# Altium PCB Wuerfel.PcbDoc
Units mil, origin at the board's own origin, x right, y up, seen from the top; angles counter-clockwise.
Board outline 4625.98 x 2755.91 mil, 2 copper layers (Top Layer, Bottom Layer); 32 components, 40 nets, 143 pads, 0 vias.
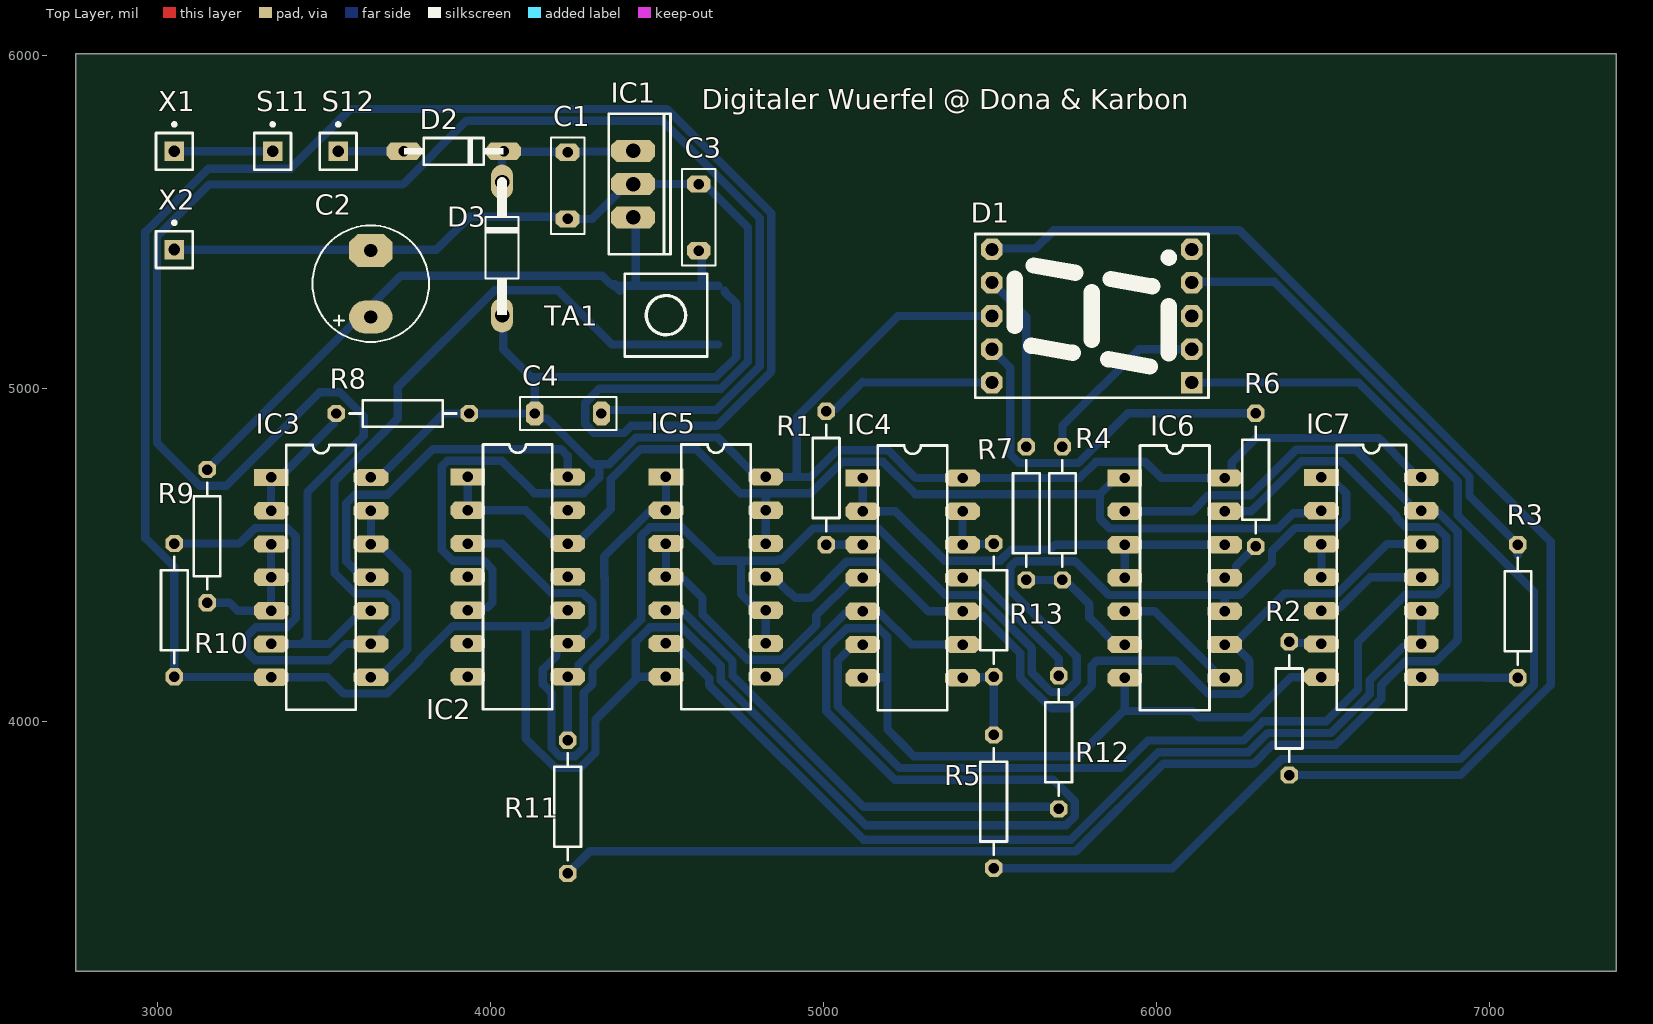
[diagram p0: Top Layer view]
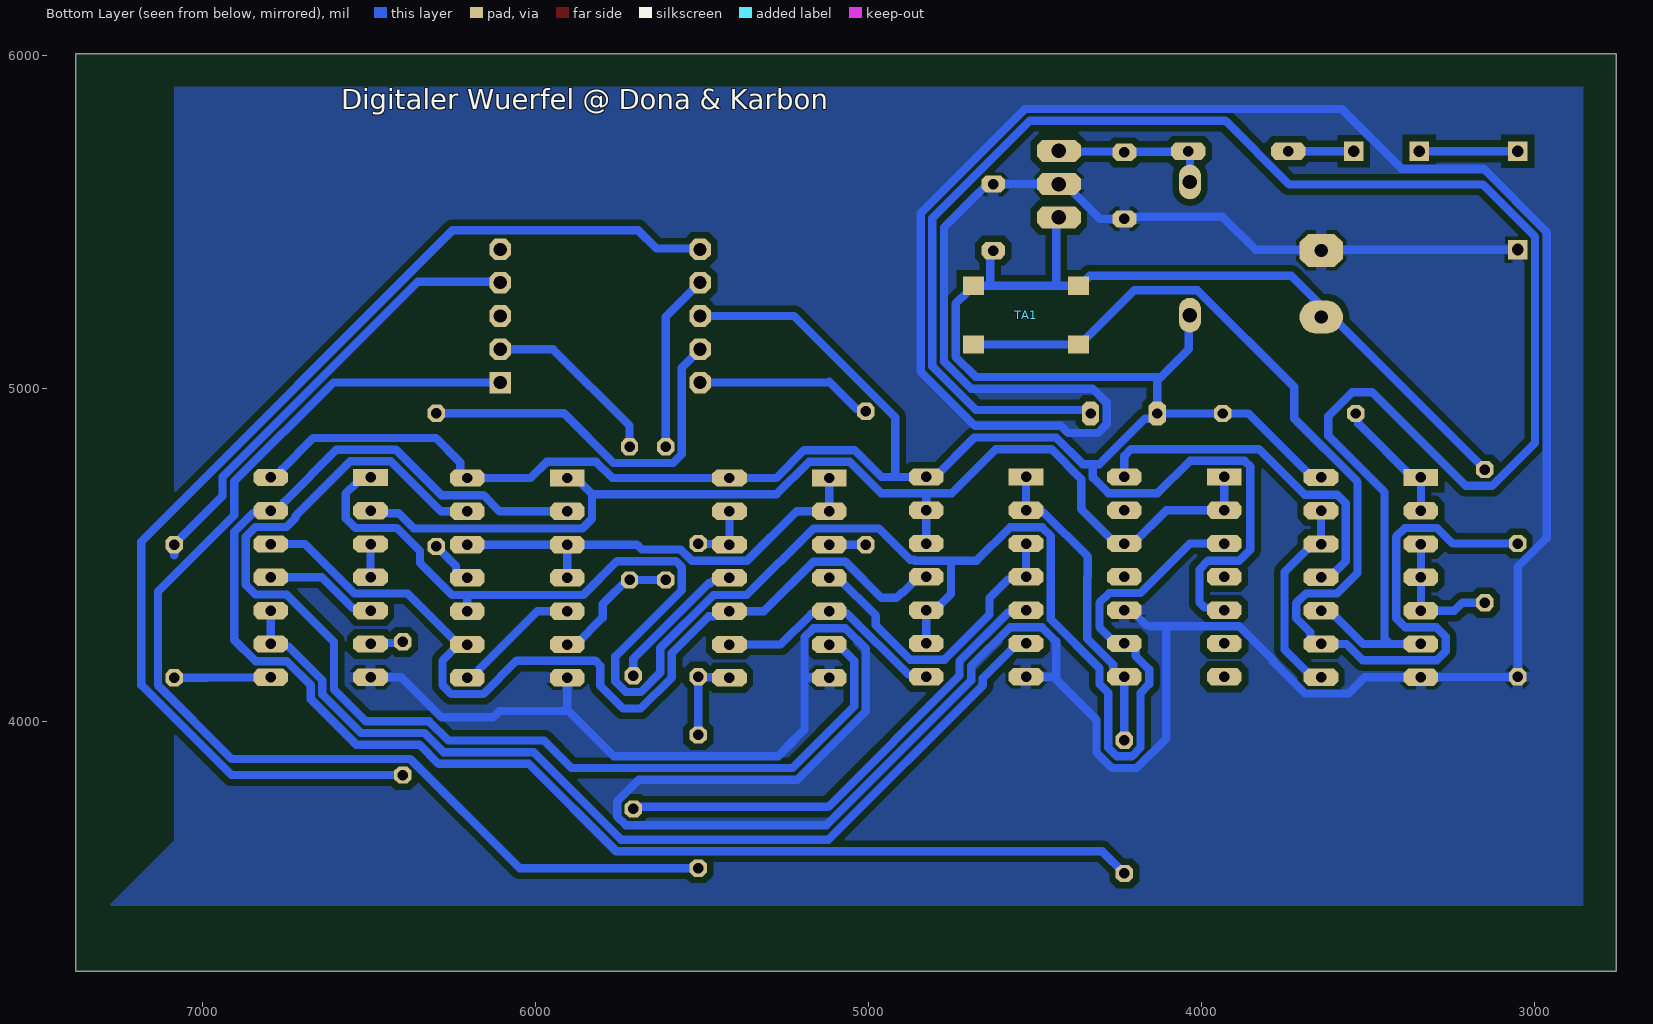
[diagram p1: Bottom Layer view, seen from below]
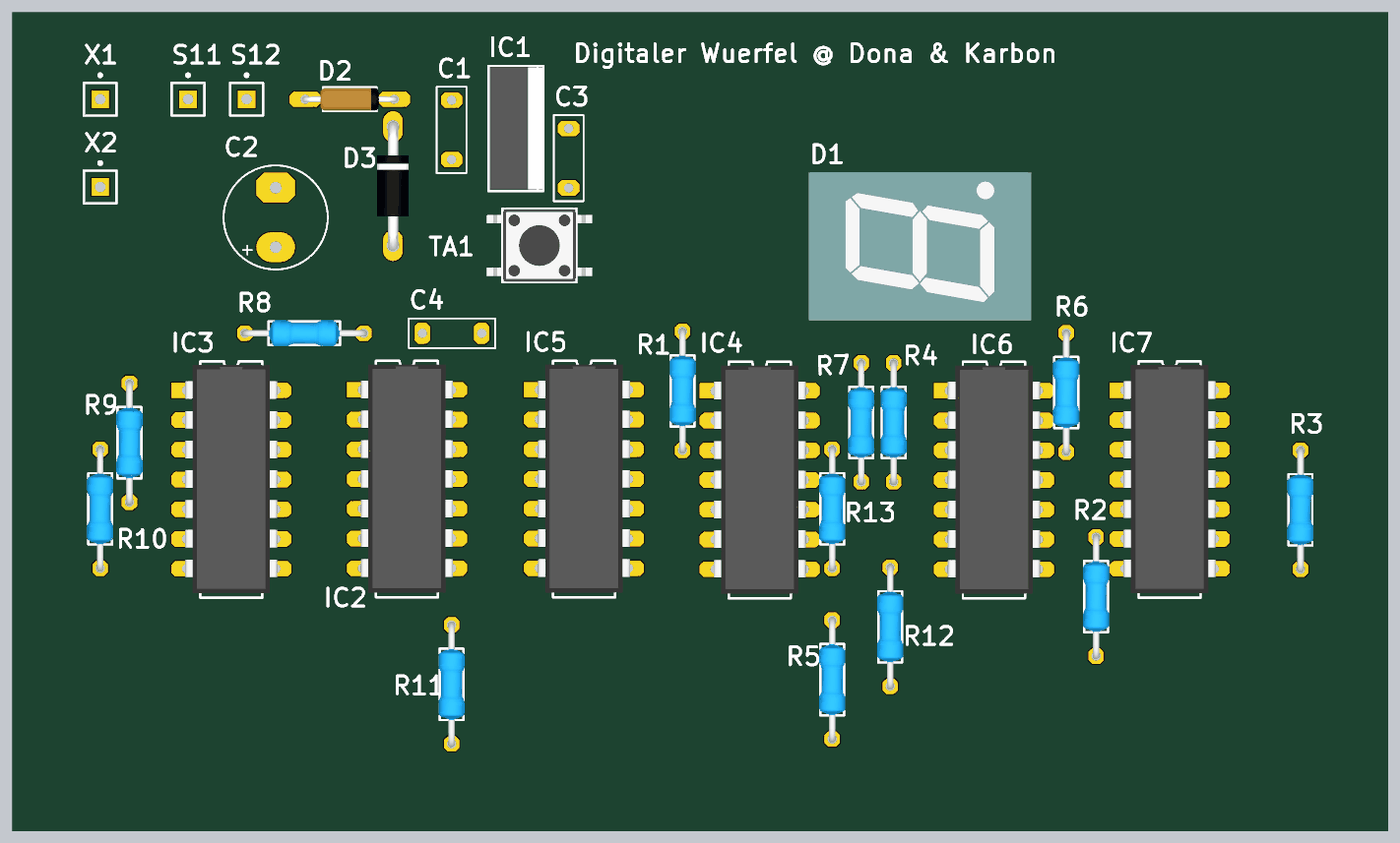
[diagram p2: 3D render of the assembled board from above, using the file's embedded part models]

## Layer stack, top to bottom
Top Solder: solder mask 0.4, Solder Resist, Dk 3.5
Top Layer: signal copper 1.4
Dielectric1: dielectric 12.6, FR-4, Dk 4.8
Bottom Layer: signal copper 1.4
Bottom Solder: solder mask 0.4, Solder Resist, Dk 3.5

## Board outline
2755.91,3248.03 2755.91,6003.94 7381.89,6003.94 7381.89,3248.03

## Design rules (kind name [scope] priority, off if disabled: settings)
Clearance "Text (Polygon)" [inPolygon vs isText] p1: gap=0 ignorepadtopadclearanceinfootprint=FALSE
Clearance "Masseflaeche (Polygon)" [All vs inPolygon] p2: gap=20 ignorepadtopadclearanceinfootprint=FALSE except(0: Arc-Hole Track-Hole SMDPad-Hole THPad-Hole Via-Hole Fill-Hole Poly-Hole Region-Hole Text-Hole)
Clearance "Abstand (Clearance)" [All] p3: gap=10 ignorepadtopadclearanceinfootprint=FALSE except(0: Arc-Hole Track-Hole SMDPad-Hole THPad-Hole Via-Hole Fill-Hole Poly-Hole Region-Hole Text-Hole)
DiffPairsRouting [All] p1: maxlimit=15 minlimit=12 mostfreqgap=12 toplayer_minwidth=15 toplayer_maxwidth=15 toplayer_prefwidth=15 bottomlayer_minwidth=15 bottomlayer_maxwidth=15 bottomlayer_prefwidth=15 maxuncoupledlength=500
FabricationTestPointUsage TestPointUsage [All] p1: valid=0 allowmultiple=FALSE
FabricationTestpoint Testpoint [All] p1: side=3 testpointundercomponent=TRUE minsize=40 maxsize=100 preferedsize=60 minholesize=0 maxholesize=40 preferedholesize=32 testpointgrid=1 allowsidetop=TRUE allowsidebottom=TRUE usegrid=TRUE gridtolerance=0.01
HoleSize [All] p1: absolutevalues=TRUE maxlimit=100 minlimit=28 maxpercent=80.000 minpercent=20.000
HoleToHoleClearance [All] p1: gap=10 allowstackedmicrovias=FALSE
PlaneConnect [All] p1: planeconnectstyle=Relief reliefexpansion=20 reliefentries=4 reliefconductorwidth=32 reliefairgap=10
PolygonConnect [All] p1: connectstyle=Relief reliefconductorwidth=32 reliefentries=4 polygonreliefangle="90 Angle" airgapwidth=10
RoomDefinition Wuerfel [InComponentClass('Wuerfel')] p1: confinementstyle=ConfineIn formatcopy=TRUE lockcomponents=FALSE outline 2756.6,3250.43 7382.58,3250.43 7382.58,6006.34 2756.6,6006.34
RoutingVias [All] p1: holewidth=28 width=50 viastyle="Through Hole" minholewidth=28 minwidth=50 maxholewidth=28 maxwidth=50
SMDEntry [All] p1: side=TRUE corner=TRUE anyangle=FALSE
SilkToSilkClearance [All] p1 off: silktosilkclearance=10
SilkToSolderMaskClearance SilkscreenOverComponentPads [IsPad] p1 off: minsilkscreentomaskgap=10 clearancetoexposedcopper=TRUE
SolderMaskExpansion [All] p1: expansion=4 istentingtop=FALSE
UnRoutedNet [All] p1: checkbadconnections=TRUE
Width [All] p1: maxlimit=200 minlimit=11 preferedwidth=25 minimp=50.000000 maximp=50.000000 favimp=50.000000
21 further rules are at their usual default settings.

## Components (designator, comment, footprint, x,y, rotation, side; value= is the part's Value field where it differs from the comment)
C1 "0.33uF" C_RM2-025X075 4232.98,5507.91 r90 top
C2 "1uF" C_POL_RM2-8,5 3641.73,5213.39 r90 top
C3 "0.1uF" C_RM2-025X075 4626.68,5412.64 r90 top
C4 "1nF" C_RM2-025X075 4134.55,4923.66 r0 top
D1 "LED_7Seg_CA" LED_7Seg 5807.09,5216.54 r90 top
D2 "1N4148" D_DO35-RM3 3740.85,5711.06 r0 top
D3 "1N4002" D_DO41-RM4 4036.13,5218.94 r90 top
IC1 "7805" TO-220 4429.83,5712.64 r270 top
IC2 "SN74LS93" DIP14 3932.98,4733.11 r270 top
IC3 "SN74LS00" DIP14 3342.43,4731.53 r270 top
IC4 "SN74LS00" DIP14 5118.8,4729.96 r270 top
IC5 "SN74LS00" DIP14 4528.25,4733.11 r270 top
IC6 "SN74LS00" DIP14 5906.2,4729.96 r270 top
IC7 "SN74LS00" DIP14 6496.76,4731.53 r270 top
R1 "330" R_0207/RM4 5009.3,4729.96 r90 top
R2 "330" R_0207/RM4 6399.72,4037.83 r270 top
R3 "330" R_0207/RM4 7086.61,4329.96 r90 top
R4 "330" R_0207/RM4 5718.8,4623.71 r90 top
R5 "330" R_0207/RM4 5512.5,3758.34 r270 top
R6 "330" R_0207/RM4 6299.21,4724.41 r90 top
R7 "330" R_0207/RM4 5610.24,4623.71 r90 top
R8 "68K" R_0207/RM4 3737.99,4923.66 r180 top value=100K
R9 "33K" R_0207/RM4 3150.3,4555.43 r270 top
R10 "1K" R_0207/RM4 3051.87,4333.11 r90 top
R11 "1" R_0207/RM4 4232.98,3742.56 r90 top
R12 "1" R_0207/RM4 5707.51,3936.02 r90 top
R13 "1" R_0207/RM4 5512.5,4333.08 r270 top
S11 "Plug" PIN1 3347.15,5711.06 r0 top
S12 "Plug" PIN1 3544,5711.06 r0 top
TA1 "Mikrotaster 1x2" "SW_DTSM-61NT/R - 1x2" 4528.25,5218.94 r180 top
X1 "Plug" PIN1 3051.87,5711.06 r0 top
X2 "Plug" PIN1 3051.87,5415.79 r0 top

## Footprints (in the part's own frame and the unit in brackets; to place one, negate y for a bottom-side part, rotate by r counter-clockwise, add the part's x,y. Pads: shape width x height; smd on the part's side, far side on the other; paste and mask are expansions set on the pad)
C_POL_RM2-8,5 [mil] "RM2, diameter 8.5 mm"
  oval 100x130 hole 39.37: 1(0,0)
  oct 100x130 hole 39.37: 2(200,0)
  silkscreen extent -75,-175 275,175
C_RM2-025X075 [mil] "RM2, outline 2.5 x 7.5 mm"
  oct 52x72 hole 31.5: 1(0,0) 2(200,0)
  silkscreen extent -45,-50 245,50
D_DO35-RM3 [mil] "DO35-7, diameter 2 mm, horizontal, grid 7.62 mm"
  oct 104x52 hole 31.5: A(0,0) C(300,0)
  silkscreen extent 0,-40 300,40, body extent -10,-38 310,38, height 77
D_DO41-RM4 [mil] "DO41-10, diameter 2.54 mm, horizontal, grid 10.16 mm"
  oval 104x66 hole 43.31: A(0,0) C(400,0)
  silkscreen extent 0,-50 400,50, body extent -17,-53 417,53, height 132
DIP14 [mil] "DIP; 14 Leads; Row Spacing 7.62 mm; Pitch 2.54 mm"
  rect 52x104 hole 31.5: 1(0,0)
  oct 52x104 hole 31.5: 2(100,0) 3(200,0) 4(300,0) 5(400,0) 6(500,0) 7(600,0) 8(600,300) 9(500,300) 10(400,300) 11(300,300) 12(200,300) 13(100,300) 14(0,300)
  silkscreen extent -98,46 698,254, body extent -85,-5 683,305, height 200
LED_7Seg [mil] "LED, 7-Segment Display, 13 mm"
  rect 65x65 hole 39.37: 1(-200,-300)
  oct 65x65 hole 39.37: 2(-100,-300) 3(0,-300) 4(100,-300) 5(200,-300) 6(200,300) 7(100,300) 8(0,300) 9(-100,300) 10(-200,300)
  silkscreen extent -246,-350 246,350, body extent -250,-374 250,374, height 325
PIN1 [mm] "Connector; Plug"
  rect 1.5x1.5 hole 0.9: 1(0,0)
  silkscreen extent -1.4,-1.4 1.4,2.17
R_0207/RM4 [mil] "type 0207, RM4"
  oct 52x52 hole 31.5: 1(-200,0) 2(200,0)
  silkscreen extent -160,-40 160,40, body extent -211,-44 211,44, height 94
"SW_DTSM-61NT/R - 1x2" [mm] "Switch, Push Button, Thru-Hole; 4 Leads; Body 8.5 x 8.5 mm (LxW typ); Row Spacing 9.0 mm; Pitch 4.5 mm"
  rect 1.6x1.4 smd far side: 1(-4,-2.25) 1(4.01,-2.25) 2(-4,2.24) 2(4.01,2.24)
  silkscreen extent -3.16,-3.16 3.15,3.15, body extent -4.5,-3.1 4.5,3.1, height 4.5
TO-220 [mil] "TO, Thru-Hole, Vertical, Heatsink Mounted; 3 In-Line Leads; Pitch 2.54 mm"
  oct 66x132 hole 43.31: 1(0,0) 2(100,0) 3(200,0)
  silkscreen extent -111,-73 311,112, body extent -105,-69 304,109, height 725

## Part data
C1 C3 C4: library part C, "Capacitor", Rated Voltage=50V, LatestRevisionDate=07-Sep-2019, Published=21-Feb-2011, Usage="only permitted for non-commercial purposes at HTL I Innsbruck"
C2: library part C_POL, "Polarized Capacitor", Rated Voltage=16V, LatestRevisionDate=07-Sep-2019, Published=21-Feb-2011, Usage="only permitted for non-commercial purposes at HTL I Innsbruck"
D1: "Red 7-Segment Display, CA, 13 mm Slim Font", LatestRevisionDate=21-Sep-2017, Published=21-Sep-2017, SimulationModellSource="currently not available", Usage="only permitted for non-commercial purposes at HTL I Innsbruck"
D2: "Si-Diode; 75V, 0.300A, 4.00ns (Diodes Inc.)", LatestRevisionDate=01-Nov-2012, Published=21-Feb-2011, SimulationModellSource="Diodes Incorporated", Usage="only permitted for non-commercial purposes at HTL I Innsbruck"
D3: "Si-Diode; 100V, 1.00A, 3.00us (Diodes, Inc.)", LatestRevisionDate=01-Nov-2012, Published=21-Feb-2011, SimulationModellSource="Diodes Incorporated", Usage="only permitted for non-commercial purposes at HTL I Innsbruck"
IC1: library part 78xx, "Positive-Voltage Regulator", LatestRevisionDate=31-Oct-2012, Published=21-Feb-2011, SimulationModellSource="<no Sim-Modell found so far>", Usage="only permitted for non-commercial purposes at HTL I Innsbruck"
IC2: "4-Bit Binary Counter", LatestRevisionDate=31-Oct-2012, Published=21-Feb-2011, SimulationModellSource="TI Logic Counter", Usage="only permitted for non-commercial purposes at HTL I Innsbruck"
IC3 IC4 IC5 IC6 IC7: "Quad 2-Input Positive-NAND Gate", LatestRevisionDate=31-Oct-2012, Published=21-Feb-2011, Publisher="Michael Kupfner", SimulationModellSource="TI Logic Gate 2", Usage="only permitted for non-commercial purposes at HTL I Innsbruck"
R1 R2 R3 R4 R5 R6 R7 R8 R9 R10 R11 R12 R13: library part R, "Resistor", LatestRevisionDate=07-Sep-2019, Published=21-Feb-2011, Usage="only permitted for non-commercial purposes at HTL I Innsbruck"
TA1: "Mikrotaster 1x2; max DC 50V", LatestRevisionDate=07-Sep-2019, Published=29-Mar-2017, Publisher="Michael Kupfner", SimulationModellSource="<No SimModell found so far>", Usage="only permitted for non-commercial purposes at HTL I Innsbruck"
S11 S12 X1 X2: LatestRevisionDate=17-Jul-2002, LatestRevisionNote="Re-released for DXP Platform.", Publisher="Altium Limited"

## Nets (pads, with @x,y where several pads share a name; then routed paths per layer and width w, separated by ;. In a path a pad name is that pad's centre, name@x,y a point inside that pad or via, vN(x,y) a via of type N, cw(c..) or ccw(c..) an arc to the next point about the centre after c; other vN are vias at no path point)
GND: C1.1 C2.2 C3.2 IC1.2 IC2.10 IC3.7 IC4.7 IC5.7 IC6.7 IC7.7 R10.1 X2.1 | length 14711.5
  Bottom Layer w25: X2.1 3532.93,5415.79 3751.93,5415.79 3839.28,5415.79 3937.7,5514.21 4226.68,5514.21 C1.1 4306.48,5507.91 4385.5,5586.94 4385.5,5592.14 4406,5612.64 IC1.2 C3.2 ; 4158.48,4284.61 4106.98,4284.61 ; 4169.02,4289.47 4206.98,4327.43 IC2.10@4206.98,4333.11 ; 4437.94,4125.48 4437.94,4239.61 4479.93,4281.61 4576.57,4281.61 4692.93,4165.26 4692.93,4122.12 5127.52,3687.52 5729.83,3687.52 5756.01,3713.7 5756.01,3758.34 5690.29,3824.06 5214.84,3824.06 5009.3,4029.6 5009.3,4217.28 5070.48,4278.46 5167.12,4278.46 5193.3,4252.28 5193.3,4131.48 ; IC5.7 4445.57,4133.11 4316.48,4004.02 4316.48,3905.74 4269.79,3859.06 4196.16,3859.06 4106.98,3948.24 4106.98,4284.61 ; C3.2@4635.41,5621.37 4774.73,5482.05 4774.73,5079.37 4693.55,4998.19 4328.26,4998.19 4286.05,4955.98 4286.05,4891.34 4312.23,4865.16 4401.99,4865.16 4423.44,4886.61 4680.96,4886.61 4844.73,5050.38 4844.73,5524.9 4531.49,5838.14 3580.2,5838.14 3401.1,5659.03 3154.75,5659.03 2964.85,5469.13 2964.85,4549.32 3051.87,4462.29 R10.1 3052.66,4132.32 3341.64,4132.32 IC3.7 3512.09,4131.53 3560.59,4083.03 3690.74,4083.03 3787.7,4179.99 3787.7,4184.65 3887.66,4284.61 4106.98,4284.61 ; IC4.7 5120.33,4131.48 5193.3,4131.48 ; 5906.2,4034.44 5765.82,3894.06 5272.98,3894.06 5246.8,3920.24 5246.8,3921.37 5193.3,3974.87 5193.3,4131.48 ; IC6.7 5906.2,4030.3 6110.05,4030.3 6128.89,4011.46 6283.52,4011.46 6403.59,4131.53 IC7.7
INA: IC2.1 IC2.2 IC2.12 IC5.12 IC5.13 IC6.1 IC7.2 | length 3364.4
  Bottom Layer w25: IC2.1 IC2.2 4106.98,4633.11 4206.98,4533.11 IC2.12 4258.98,4533.11 4362.64,4636.77 4362.64,4726.81 4452.43,4816.61 4618.75,4816.61 4750.75,4684.61 4825.1,4684.61 ; IC5.12 IC5.13 4827.75,4633.61 4827.75,4681.96 4825.1,4684.61 ; IC6.1 5880.2,4729.96 5831.7,4681.46 ; IC7.2 6488.93,4623.71 6411.7,4623.71 6366.45,4578.46 5860.88,4578.46 5831.7,4607.64 5831.7,4681.46 ; 4825.1,4684.61 4963.63,4684.61 5057.48,4778.46 5180.12,4778.46 5277.12,4681.46 5831.7,4681.46
INB: IC2.3 IC2.9 IC5.9 IC5.10 IC6.10 IC7.1 | length 5597.1
  Bottom Layer w25: IC2.3 4036.16,4533.11 4184.66,4384.61 4278.3,4384.61 4307.48,4355.43 4307.48,4281.61 4258.98,4233.11 IC2.9 4212.65,4233.11 4199.15,4219.61 4199.15,4196.11 4158.48,4155.43 4158.48,4110.79 4184.66,4084.61 4184.66,4002.51 4184.48,4002.33 4184.48,3920.24 4210.66,3894.06 4255.3,3894.06 4281.48,3920.24 4281.48,4002.33 4281.3,4002.51 4281.3,4084.61 4307.48,4110.79 4307.48,4158.65 4453.75,4304.93 4453.75,4555.43 4479.93,4581.61 4576.57,4581.61 4676.57,4481.61 4753.75,4481.61 ; 4794.43,4481.61 4753.75,4481.61 ; 4796.93,4481.61 4861.95,4481.61 4864.95,4484.61 4876.57,4484.61 4970.42,4578.46 5167.12,4578.46 5367.12,4378.46 5467.12,4378.46 5626.73,4218.85 5626.73,4145.98 5685.19,4087.52 5729.83,4087.52 5761.7,4119.39 5761.7,4194.32 5561.74,4394.29 5561.74,4461.99 5579.78,4480.03 5756.31,4480.03 5857.88,4378.46 6206.2,4378.46 ; IC5.9 IC5.10 4802.25,4333.11 4753.75,4381.61 4753.75,4481.61 ; IC6.10 6206.2,4378.46 ; IC6.10@6226.53,4329.96 IC6.10@6240.03,4343.46 ; IC7.1 6510.26,4718.03 6536.41,4718.03 6571.26,4683.18 6571.26,4609.21 6542.08,4580.03 6417.52,4580.03 6348.41,4510.92 6348.41,4475.34 6251.52,4378.46 6206.2,4378.46
INC: IC2.8 IC5.1 IC5.2 R11.2 | length 952.9
  Bottom Layer w25: R11.2 IC2.8 4253.3,4133.11 4266.8,4146.61 4266.8,4170.11 4344.83,4248.14 4344.83,4431.53 ; 4342.48,4431.53 4342.48,4493.65 4474.11,4625.29 4488.75,4625.29 4496.57,4633.11 IC5.2 IC5.1
NetC1_2: C1.2 D2.C D3.C IC1.1 | length 484.1
  Bottom Layer w25: D3.C 4036.13,5706.34 D2.C ; D2.C@4042.43,5709.49 4231.4,5709.49 C1.2 4235.34,5710.27 4427.46,5710.27 IC1.1
NetC4_2: C4.2 IC3.6 IC3.10 | length 5596.6
  Bottom Layer w25: IC3.6 3435.31,4231.53 ; IC3.10 3616.43,4331.53 3516.43,4231.53 3435.31,4231.53 ; C4.2 4344.83,4933.94 4678.8,4933.94 4809.73,5064.87 4809.73,5510.41 4517,5803.14 3929.74,5803.14 3737.99,5611.39 3156.6,5611.39 2999.85,5454.63 2999.85,4835.06 3127.98,4706.93 3208,4706.93 3488.9,4987.83 3548.35,4987.83 3620.65,4915.52 3620.65,4856.08 3451.93,4687.35 3451.93,4248.14 3435.31,4231.53
NetD1_1: D1.1 R5.2 | length 3482
  Bottom Layer w25: R5.2 6049.4,3558.34 6377.4,3886.33 6913.81,3886.33 7135.11,4107.64 7135.11,4388.99 6906.26,4617.85 6906.26,4718.85 6608.57,5016.54 D1.1 D1.1@6109.49,5018.94
NetD1_2: D1.2 R4.2 | length 546.8
  Bottom Layer w25: R4.2 5718.8,4887.21 5948.13,5116.54 D1.2
NetD1_4: D1.4 R3.2 | length 1372.9
  Bottom Layer w25: D1.4 6109.49,5318.94 6355.67,5318.94 6941.26,4733.35 6941.26,4675.32 R3.2 7086.61,4498.42
NetD1_6: D1.6 R2.2 | length 3417.2
  Bottom Layer w25: D1.6 5509.49,5418.94 5638.23,5418.94 5693.23,5473.94 6250.17,5473.94 7185.04,4539.07 7185.04,4108.07 6914.81,3837.83 R2.2
NetD1_7: D1.7 R7.2 | length 535.5
  Bottom Layer w25: D1.7 5610.24,5213.39 R7.2
NetD1_9: D1.9 R6.2 | length 1148.2
  Bottom Layer w25: D1.9 5562.09,5061.54 5562.09,4931.64 5561.74,4931.29 5561.74,4801.39 5587.92,4775.21 5766.5,4775.21 5915.7,4924.41 R6.2
NetD1_10: D1.10 R1.2 | length 535.6
  Bottom Layer w25: R1.2 5017.13,4937.78 5037.65,4937.78 5118.8,5018.94 5121.2,5016.54 D1.10
NetD2_A: D2.A S12.1 | length 196.9
  Bottom Layer w25: S12.1 D2.A
NetIC2_14: IC2.14 IC3.11 | length 1072.7
  Bottom Layer w25: IC3.11 3616.43,4431.53 3567.93,4480.03 3567.93,4653.85 3594.11,4680.03 3692.27,4680.03 3828.84,4816.61 4212.98,4816.61 4232.98,4796.61 IC2.14
NetIC3_1: IC3.1 IC3.2 R8.2 | length 388.4
  Bottom Layer w25: IC3.2 IC3.1 3368.43,4731.53 3530.17,4893.28 3530.17,4915.84 R8.2
NetIC3_3: IC3.3 IC3.4 IC3.5 R9.2 | length 402
  Bottom Layer w25: R9.2 3217.5,4355.43 3241.4,4331.53 IC3.5 IC3.4 IC3.3
NetIC3_8: IC3.8 IC3.12 IC3.13 | length 621.2
  Bottom Layer w25: IC3.8 3668.43,4131.53 3751.93,4215.03 3751.93,4448.03 3668.43,4531.53 IC3.12 IC3.13
NetIC3_9: IC3.9 R10.2 TA1.2 | length 3435.8
  Bottom Layer w25: R10.2 3247.18,4533.11 3294.11,4580.03 3390.74,4580.03 3416.93,4553.85 3416.93,4309.21 3389.24,4281.53 3295.61,4281.53 3267.93,4253.85 3267.93,4209.21 3294.11,4183.03 3517.42,4183.03 3565.92,4231.53 3661.35,4231.53 3674.85,4245.03 3674.85,4267.14 3716.93,4309.21 3716.93,4353.85 3687.74,4383.03 3594.11,4383.03 3532.93,4444.21 3532.93,4718.85 3722.78,4908.7 3722.78,5003.07 4013.14,5293.44 4203.75,5293.44 4366.44,5130.75 TA1.2@4685.73,5130.75
NetIC4_1: IC4.1 IC4.2 IC6.3 IC6.4 IC6.12 | length 1369
  Bottom Layer w25: IC4.1 IC4.2 5217.23,4629.96 5365.73,4481.46 5531.7,4481.46 5565.28,4515.03 5681.99,4515.03 5696.91,4529.96 IC6.3 ; IC6.4 IC6.3 ; IC6.12 IC6.3
NetIC4_4: IC4.4 IC5.3 IC5.4 | length 941.8
  Bottom Layer w25: IC5.3 IC5.4 4536.07,4425.29 4582.39,4425.29 4637.75,4369.93 4637.75,4319.42 4772.57,4184.61 4876.57,4184.61 4979.36,4287.39 4979.36,4316.51 5092.8,4429.96 IC4.4
NetIC4_5: IC4.5 IC4.9 IC5.8 | length 713.5
  Bottom Layer w25: IC5.8 4836.07,4140.93 4882.39,4140.93 4972.99,4231.53 4974.06,4231.53 5064.66,4322.14 5110.98,4322.14 IC4.5 5126.63,4322.14 5172.94,4322.14 5265.12,4229.96 IC4.9
NetIC4_6: IC4.6 IC6.13 | length 3416.7
  Bottom Layer w25: IC4.6 5092.8,4229.96 5044.3,4181.46 5044.3,4044.09 5229.34,3859.06 5893.52,3859.06 5975.93,3941.46 6263.02,3941.46 6320.61,3999.06 6510.6,3999.06 6606.26,4094.72 6606.26,4237.85 6748.44,4380.03 6842.08,4380.03 6871.26,4409.21 6871.26,4553.85 6842.08,4583.03 6748.44,4583.03 6722.26,4609.21 6722.26,4615.85 6558.08,4780.03 6435.44,4780.03 6285.36,4629.96 IC6.13
NetIC4_10: IC4.10 IC5.11 IC6.9 IC7.12 | length 2753.5
  Bottom Layer w25: IC5.11 4851.77,4433.11 4899.63,4385.25 4902.11,4385.25 4917.43,4369.93 4961.95,4369.93 5070.48,4478.46 5167.12,4478.46 5315.62,4329.96 5450.48,4329.96 5465.94,4314.5 5481.59,4314.5 5591.73,4204.36 5591.73,4131.48 5685.38,4037.83 5737.93,4037.83 5807.09,4106.99 5807.09,4166.81 5821.73,4181.46 6057.88,4181.46 6157.88,4081.46 6254.52,4081.46 6280.7,4107.64 6280.7,4181.46 IC6.9@6232.2,4229.96 ; IC6.9 IC6.9@6232.2,4229.96 ; IC7.12 6693.58,4531.53 6545.08,4383.03 6385.28,4383.03 IC6.9@6232.2,4229.96
NetIC4_11: IC4.11 R12.2 | length 440.7
  Bottom Layer w25: IC4.11 5426.63,4422.14 5467.25,4422.14 5475.93,4413.46 5481.62,4413.46 5707.51,4187.57 R12.2
NetIC4_12: IC4.12 IC4.13 R13.1 | length 195
  Bottom Layer w25: IC4.13 IC4.12 5420.36,4531.52 5510.94,4531.52 R13.1
NetIC5_5: IC5.5 R12.1 | length 1461.1
  Bottom Layer w25: IC5.5 4536.07,4325.29 4582.39,4325.29 4727.93,4179.75 4727.93,4136.62 5121.98,3742.56 5700.97,3742.56 R12.1 ; R12.1@5707.51,3742.56 R12.1@5714.05,3736.02
NetIC5_6: IC5.6 IC7.9 IC7.10 | length 2893.2
  Bottom Layer w25: IC5.6 4554.25,4233.11 4657.93,4129.44 4657.93,4107.62 5121.41,3644.13 5744.35,3644.13 6006.68,3906.46 6277.51,3906.46 6335.11,3964.06 6525.09,3964.06 6641.26,4080.22 6641.26,4122.35 6742.62,4223.71 6788.93,4223.71 IC7.9 IC7.10
NetIC6_2: IC6.2 IC7.13 R11.1 | length 4495.2
  Bottom Layer w25: R11.1 4299.55,3609.13 5758.85,3609.13 6021.18,3871.46 6292.01,3871.46 6349.61,3929.06 6539.59,3929.06 6676.26,4065.72 6676.26,4107.85 6748.44,4180.03 6842.08,4180.03 6906.26,4244.21 6906.26,4568.35 6850.9,4623.71 6804.58,4623.71 IC7.13 6776.43,4631.53 6757.26,4650.71 6757.26,4656.74 6598.97,4815.03 6420.94,4815.03 6284.36,4678.46 6157.88,4678.46 6109.38,4629.96 IC6.2
NetIC6_5: IC6.5 IC6.8 | length 388.6
  Bottom Layer w25: IC6.5 5995.7,4329.96 6172.38,4153.28 6172.38,4143.46 6185.88,4129.96 IC6.8
NetIC7_3: IC7.3 IC7.4 | length 100
  Bottom Layer w25: IC7.4 IC7.3
NetIC7_5: IC7.5 IC7.11 | length 341.4
  Bottom Layer w25: IC7.5 6504.58,4339.36 6550.9,4339.36 6643.07,4431.53 IC7.11
NetS11_1: S11.1 X1.1 | length 295.3
  Bottom Layer w25: X1.1 S11.1
OUT1: IC6.6 R4.1 R7.1 | length 406.2
  Bottom Layer w25: R7.1 5710.98,4423.71 5718.8,4431.53 5799.5,4350.83 5799.5,4310.66 5880.2,4229.96 IC6.6
OUT2: IC6.11 R6.1 | length 144.9
  Bottom Layer w25: IC6.11 6226.53,4429.96 6240.03,4443.46 6240.03,4465.22 R6.1
OUT3: IC7.6 R2.1 | length 99.6
  Bottom Layer w25: R2.1 6402.87,4234.68 6493.61,4234.68 IC7.6
OUT4: IC4.3 R1.1 | length 109.5
  Bottom Layer w25: R1.1 IC4.3
OUT5: IC4.8 R5.1 R13.2 | length 295.7
  Bottom Layer w25: IC4.8@5392.8,4129.96 IC4.8 5420.36,4131.52 5510.94,4131.52 R13.2 R5.1
OUT6: IC7.8 R3.1 | length 290.5
  Bottom Layer w25: IC7.8 6797.17,4131.12 6987.78,4131.12 6988.94,4129.96 R3.1
VCC: C2.1 C3.1 C4.1 D1.8 D3.A IC1.3 IC2.5 IC3.14 IC4.14 IC5.14 IC6.14 IC7.14 R8.1 R9.1 TA1.1 | length 9018.7
  Bottom Layer w25: R9.1 3732.55,5337.68 4336.74,5337.68 4351.38,5323.04 4351.38,5322.58 4361.56,5312.4 4375.26,5312.4 4375.26,5306.57 TA1.1@4389.37,5292.46 ; IC3.14 3668.43,4731.53 3860.55,4923.66 R8.1 C4.1 ; IC2.5 3940.8,4340.93 3992.48,4340.93 4007.48,4355.93 4007.48,4455.43 3981.3,4481.61 3887.66,4481.61 3854.58,4514.69 3854.58,4764.53 3871.66,4781.61 4036.13,4781.61 4133.13,4684.61 4281.3,4684.61 4327.64,4730.95 4327.64,4771.61 ; D3.A@4036.13,5199.94 D3.A ; D3.A@4039.28,5196.79 4039.28,5117.36 4123.45,5033.19 ; TA1.1@4370.38,5307.52 4437.94,5307.52 ; IC1.3 4437.94,5504.53 4437.94,5307.52 ; C3.1 4635.41,5403.9 4635.41,5312.4 4640.3,5307.52 ; TA1.1@4685.73,5307.52 4640.3,5307.52 ; TA1.1@4704.73,5292.46 4704.73,5288.52 4739.73,5253.52 4739.73,5093.87 4679.05,5033.19 4123.45,5033.19 ; D1.8 5225.06,5216.54 4921.26,4912.74 4921.26,4733.11 ; IC7.14 6776.43,4731.53 6762.93,4745.03 6762.93,4755.91 6668.81,4850.03 6300.33,4850.03 6227.25,4776.95 6227.25,4743.46 6213.75,4729.96 6016.02,4729.96 5967.52,4778.46 5819.24,4778.46 5770.74,4729.96 IC4.14 5278.12,4729.96 5194.62,4813.46 5042.99,4813.46 4962.64,4733.11 4921.26,4733.11 ; 4123.45,5033.19 4134.55,5022.09 C4.1 ; C4.1 4134.55,4921.58 4148.05,4908.08 4171,4908.08 4307.48,4771.61 4327.64,4771.61 ; 4327.64,4771.61 4357.93,4771.61 4437.94,4851.61 4683.75,4851.61 4802.25,4733.11 IC5.14 4921.26,4733.11 ; 4437.94,5307.52 4640.3,5307.52
pads on no net: D1.3 D1.5 IC2.4 IC2.6 IC2.7 IC2.11 IC2.13

## Polygon pours and split planes (outlines as drawn)
GND on Bottom Layer "GND_L-01_P-001" (solid, remove dead copper, pour order 0): 2854.33,5905.51 2854.33,3444.88 7283.46,3444.88 7086.61,3641.73 7086.61,5905.51

## Other copper
Top Layer:
  text "LAYOUT TOP" at 10300,880 h70
  text "2" at 10300,280 h70
Bottom Layer:
  text "LAYOUT BOTTOM" at 10300,880 h70
  text "3" at 10300,280 h70

## Silkscreen, mask and mechanical layers (free items; w line width, h text height)
Top Overlay:
  text "Digitaler Wuerfel @ Dona & Karbon" at 4635.98,5837.08 h60
  text "BESTUECK. TOP" at 10300,880 h70
  text "4" at 10300,280 h70
Bottom Overlay:
  text "Digitaler Wuerfel @ Dona & Karbon" at 6584.49,5837.08 h60
  text "BESTUECK. BOTTOM" at 10300,880 h70
  text "5" at 10300,280 h70
Mechanical 4 (Printumriss):
  the board outline again, w10
Mechanical 16 (Blatt-Beschriftung):
  drawing of 350 lines, arcs and shapes, not listed
  text "1" at 1427,7465 h70
  text "2" at 4287,7465 h70
  text "3" at 7167,7465 h70
  text "4" at 10037,7465 h70
  text "A" at 75,6559 h70
  text "A" at 11375,6559 h70
  text "B" at 75,4667 h70
  text "B" at 11375,4667 h70
  text "C" at 75,2757 h70
  text "TITEL:" at 6850,1300 h45
  text "DIGITALER WUERFEL" at 6900,1180 h70
  text "NAME:" at 6850,1000 h45
  text "GRUPPE:" at 8350,1000 h45
  text "KLASSE:" at 9180,1000 h45
  text "DOKUMENTENART:" at 10250,1000 h45
  text "PHILIPP DONA, LISA KARBON" at 6900,880 h70
  text "III" at 8400,880 h70
  text "2AHEL" at 9230,880 h70
  text "D" at 75,867 h70
  text "D" at 11375,867 h70
  text "DATUM:" at 6850,700 h45
  text "REVISION:" at 8350,700 h45
  text "MASZSTAB:" at 9180,700 h45
  text "DOKUMENTENSTATUS:" at 10250,700 h45
  text "HTBLVA" at 5550,600 h70
  text ".PRINT_DATE" at 6900,580 h70
  text "0.1" at 8400,580 h70
  text ".Print_Scale" at 9230,580 h70
  text "ENTWURF" at 10300,580 h70
  text "Abt. Elektronik" at 5550,500 h70
  text "Anichstrasse 26-28" at 5550,400 h70
  text "SACHNUMMER/DATEINAME:" at 6850,400 h45
  text "BLATT:" at 10250,400 h45
  text "BLAETTER:" at 10800,400 h45
  text "A-6020 Innsbruck" at 5550,300 h70
  text ".PCB_FILE_NAME_NO_PATH" at 6900,280 h70
  text "6" at 10850,280 h70
  text "1" at 1427,65 h70
  text "2" at 4287,65 h70
  text "3" at 7167,65 h70
  text "4" at 10037,65 h70
Drill Drawing:
  text ".LEGEND" at 4700,1800 h60
  text "BOHRPLAN" at 10300,880 h70
  text "6" at 10300,280 h70

## Dimensions
7381.89,3248.03 to 7381.89,6003.94 on Mechanical 3 (Bemassungen)
2755.91,3248.03 to 7381.89,3248.03 on Mechanical 3 (Bemassungen)